# Altium PCB m2m.PcbDoc
Units mm, origin at the board's own origin, x right, y up, seen from the top; angles counter-clockwise.
Board outline 82.79 x 56.74 mm, 2 copper layers (Top Layer, Bottom Layer); 175 components, 130 nets, 579 pads, 0 vias.
Unrouted connection lines stored in the file: 376.
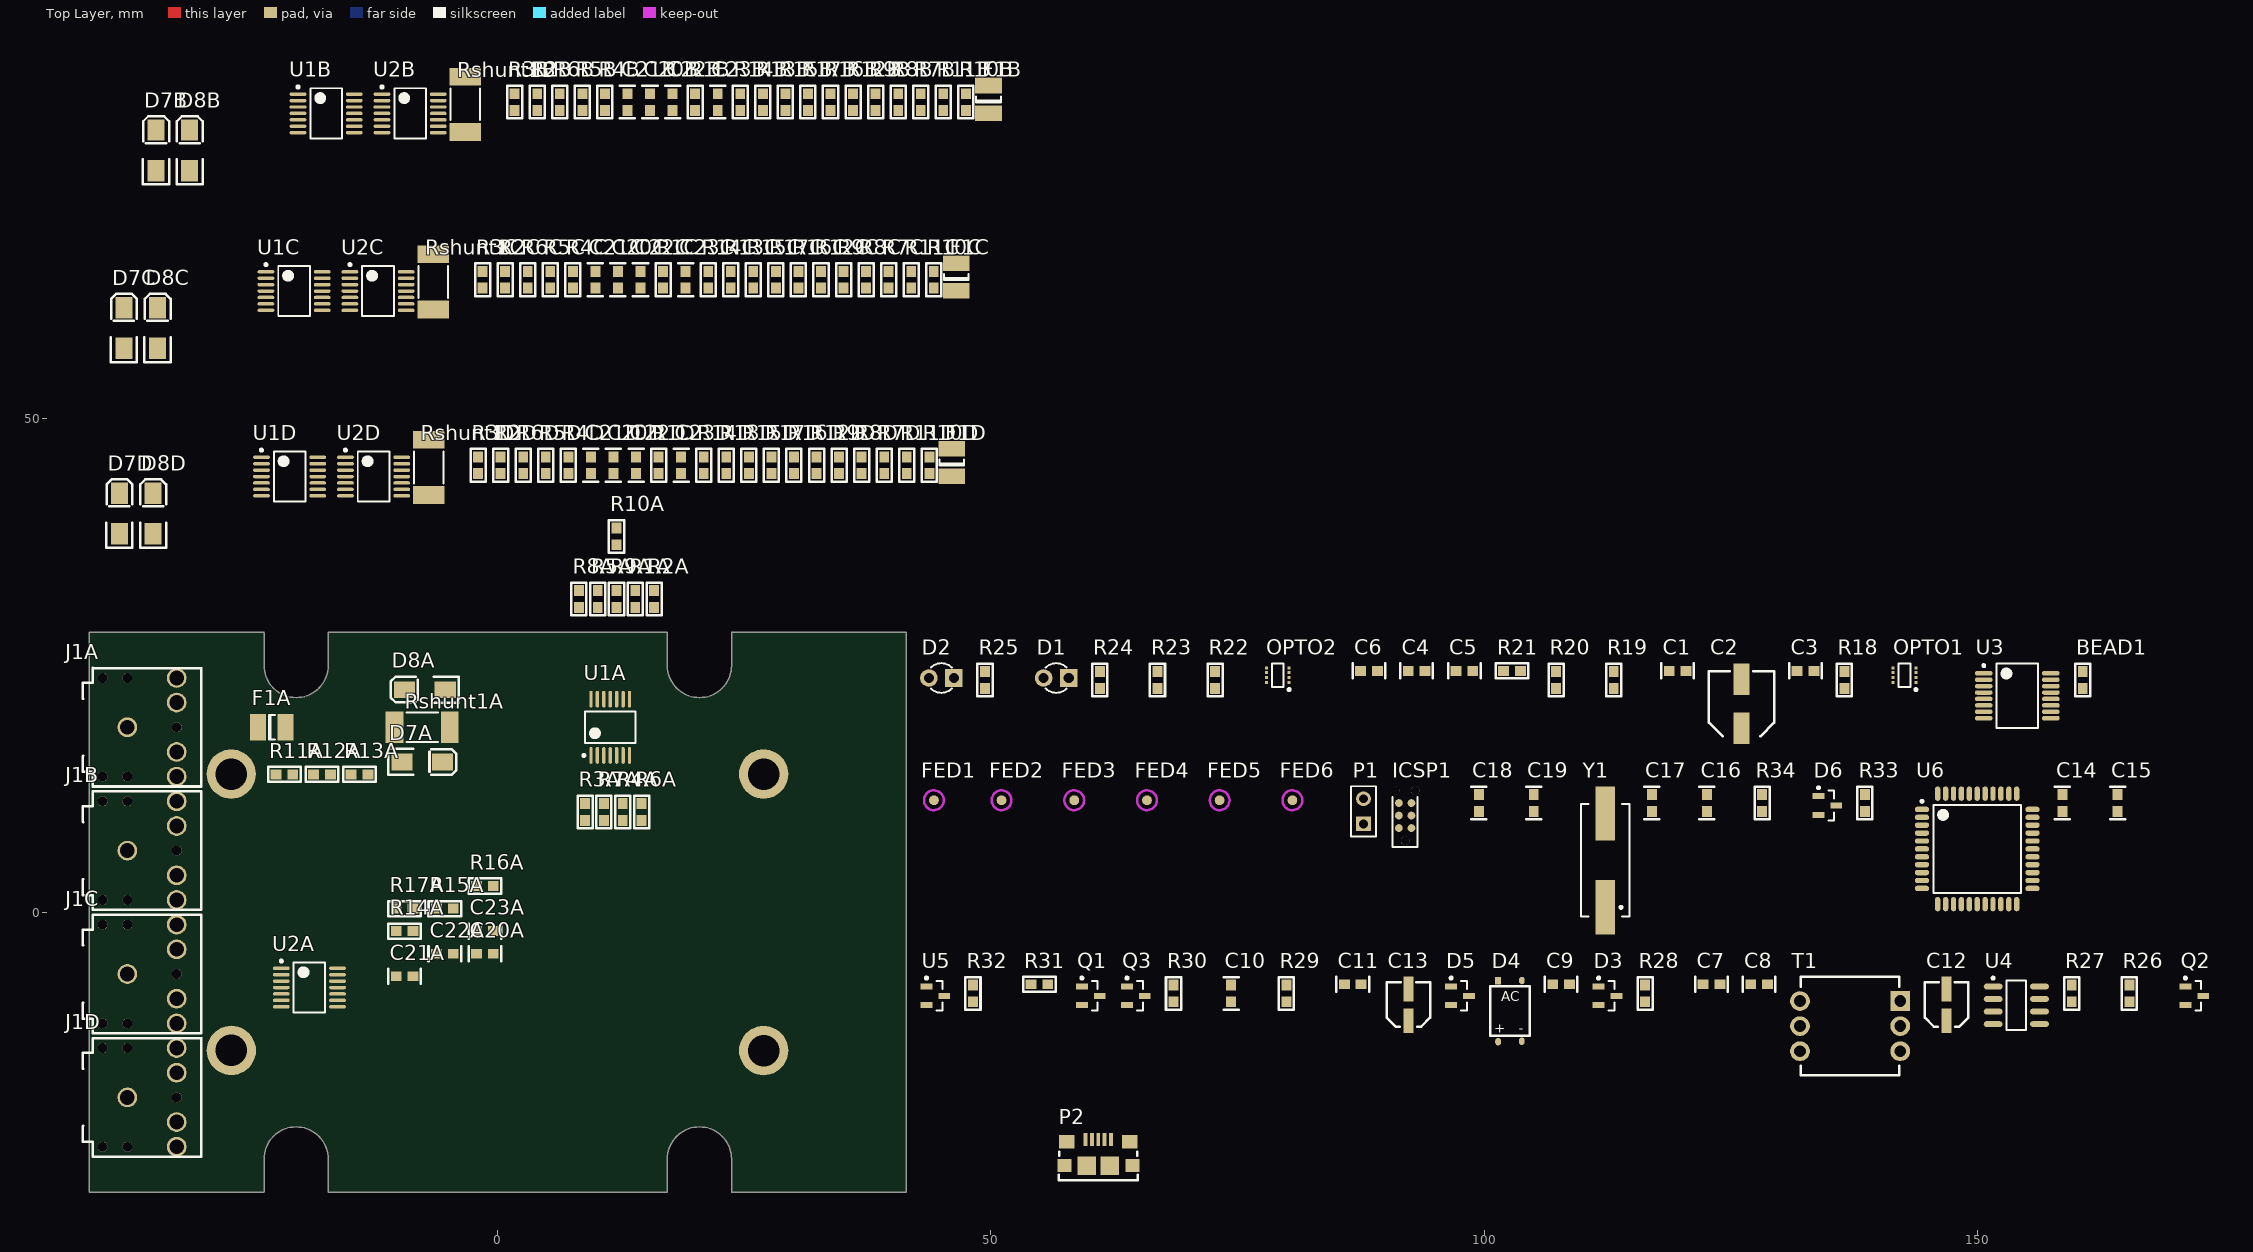
[diagram p0: Top Layer view]
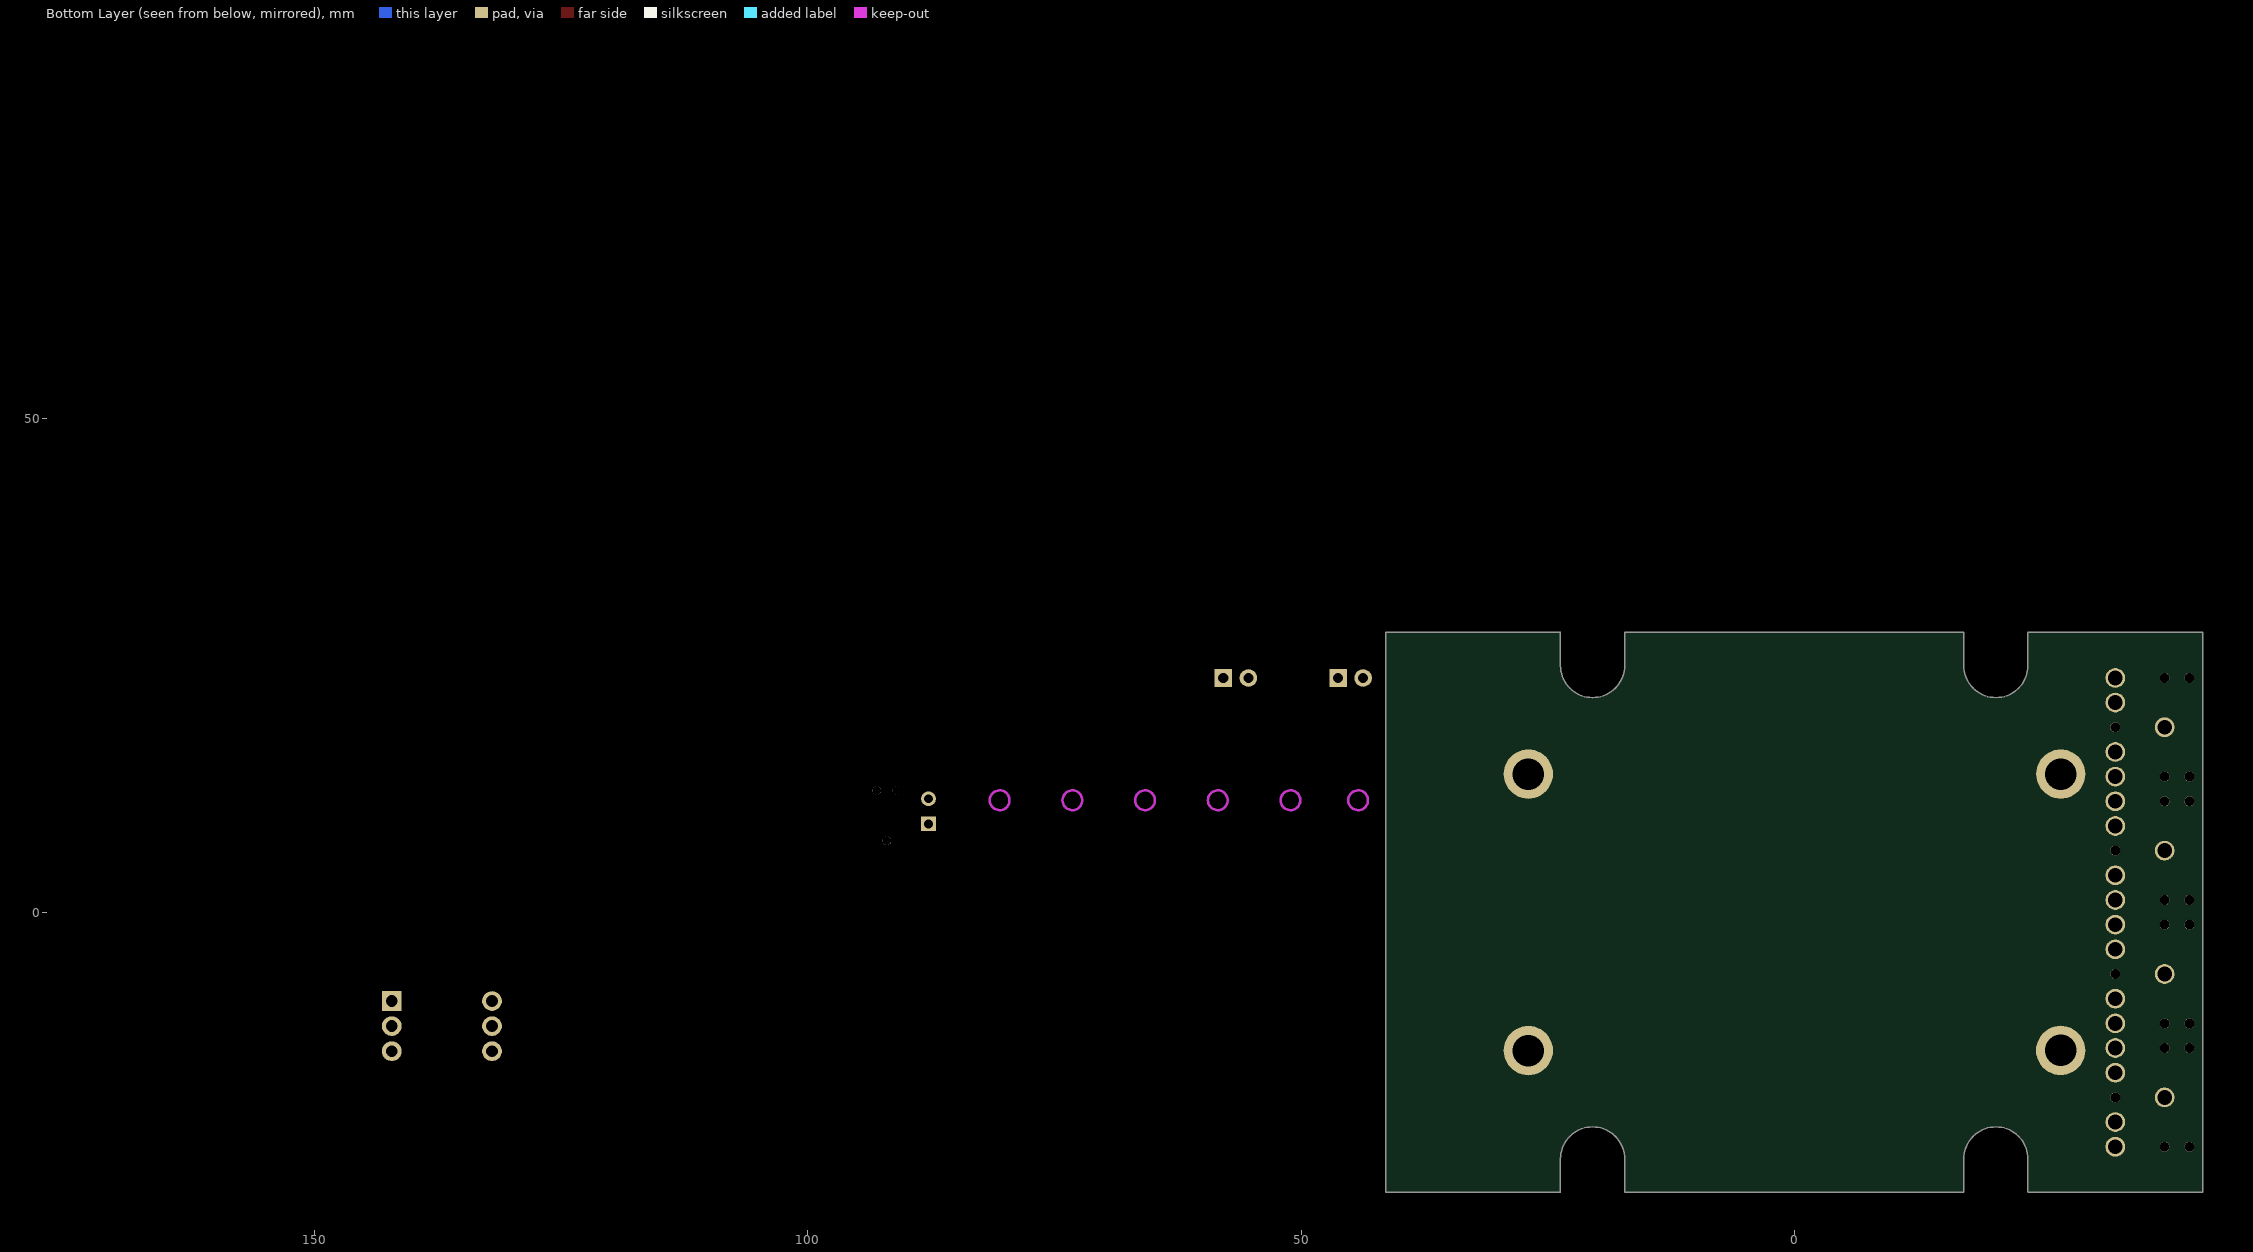
[diagram p1: Bottom Layer view, seen from below]

## Layer stack, top to bottom
Top Layer: signal copper 0.0356
Dielectric: dielectric 0.32, FR-4, Dk 4.8
Bottom Layer: signal copper 0.0356

## Board outline
-41.295,-28.361 cw(c-41.295,-28.297) -41.359,-28.297 -41.359,28.314 cw(c-41.295,28.314) -41.295,28.378 -23.711,28.378 cw(c-23.711,28.314) -23.647,28.314 -23.647,25.008 ccw(c-20.395,25.008) -17.143,25.008 cw(c-17.079,25.008) -17.143,25.008 -17.143,28.314 cw(c-17.079,28.314) -17.079,28.378 17.151,28.378 cw(c17.151,28.314) 17.215,28.314 17.215,25.008 cw(c17.151,25.008) 17.215,25.008 cw(c20.467,25.008) 17.215,25.008 ccw(c20.467,25.008) 20.467,21.756 ccw(c20.467,25.008) 20.468,21.756 ccw(c20.467,25.008) 23.719,25.008 23.719,28.314 cw(c23.783,28.314) 23.783,28.378 41.367,28.378 cw(c41.367,28.314) 41.431,28.314 41.431,-28.297 cw(c41.367,-28.297) 41.367,-28.361 23.783,-28.361 cw(c23.783,-28.297) 23.719,-28.297 23.719,-24.992 ccw(c20.467,-24.992) 17.215,-24.991 cw(c17.151,-24.992) 17.215,-24.992 17.215,-28.297 cw(c17.151,-28.297) 17.151,-28.361 -17.079,-28.361 cw(c-17.079,-28.297) -17.143,-28.297 -17.143,-24.992 cw(c-17.079,-24.992) -17.143,-24.991 cw(c-20.395,-24.992) -17.143,-24.992 -17.143,-24.991 ccw(c-20.395,-24.992) -23.647,-24.992 -23.647,-28.297 cw(c-23.711,-28.297) -23.711,-28.361

## Design rules (kind name [scope] priority, off if disabled: settings)
Clearance [All] p1: gap=0.254
PolygonConnect [All] p1: connectstyle=Relief reliefconductorwidth=0.254 reliefentries=4 polygonreliefangle="90 Angle"
RoomDefinition "U_USB-UART (FTDI FT230XS)" [InComponentClass('U_USB-UART (FTDI FT230XS)')] p1: confinementstyle=ConfineIn formatcopy=TRUE lockcomponents=FALSE outline 42.596,16.789 166.98,16.789 166.98,28.016 42.596,28.016
RoomDefinition "U_Microprocessor PIC18F46K80" [InComponentClass('U_Microprocessor PIC18F46K80')] p2: confinementstyle=ConfineIn formatcopy=TRUE lockcomponents=FALSE outline 42.57,-2.489 167.716,-2.489 167.716,15.545 42.57,15.545
RoomDefinition "U_ISOLATED PSU" [InComponentClass('U_ISOLATED PSU')] p3: confinementstyle=ConfineIn formatcopy=TRUE lockcomponents=FALSE outline 42.596,-16.789 173.711,-16.789 173.711,-3.734 42.596,-3.734
RoomDefinition U_ANALOGCHANNEL4 [InComponentClass('U_ANALOGCHANNEL4')] p4: confinementstyle=ConfineIn formatcopy=TRUE lockcomponents=FALSE outline -40,32.5 4.75,32.5 4.75,44.5 -40,44.5
RoomDefinition U_ANALOGCHANNEL3 [InComponentClass('U_ANALOGCHANNEL3')] p5: confinementstyle=ConfineIn formatcopy=TRUE lockcomponents=FALSE outline -39.547,51.295 5.203,51.295 5.203,63.295 -39.547,63.295
RoomDefinition U_ANALOGCHANNEL2 [InComponentClass('U_ANALOGCHANNEL2')] p6: confinementstyle=ConfineIn formatcopy=TRUE lockcomponents=FALSE outline -36.297,69.295 8.453,69.295 8.453,81.295 -36.297,81.295
RoomDefinition U_ANALOGCHANNEL1 [InComponentClass('U_ANALOGCHANNEL1')] p7: confinementstyle=ConfineIn formatcopy=FALSE lockcomponents=FALSE outline -40.64,12.7 19.05,12.7 19.05,24.745 -40.64,24.745
RoomDefinition Multi2Meter [InComponentClass('Multi2Meter')] p8: confinementstyle=ConfineIn formatcopy=TRUE lockcomponents=FALSE outline 56.485,-28.448 65.324,-28.448 65.324,-19.558 56.485,-19.558
RoutingVias [All] p1: holewidth=0.711 width=1.27 viastyle="Through Hole" minholewidth=0.711 minwidth=1.27 maxholewidth=0.711 maxwidth=1.27
SilkscreenOverComponentPads [All] p1: minsilkscreentomaskgap=0.254
SolderMaskExpansion [All] p1: expansion=0.102
Width [All] p1: maxlimit=0.254 minlimit=0.254 preferedwidth=0.254
27 further rules are at their usual default settings.

## Classes and differential pairs
component class Multi2Meter: P2
component class U_ANALOGCHANNEL1: C20A C21A C22A C23A D7A D8A F1A J1A R1A R2A R3A R4A R5A R6A R7A R8A R9A R10A R11A R12A R13A R14A R15A R16A R17A Rshunt1A U1A U2A
component class U_ANALOGCHANNEL2: C20B C21B C22B C23B D7B D8B F1B J1B R1B R2B R3B R4B R5B R6B R7B R8B R9B R10B R11B R12B R13B R14B R15B R16B R17B Rshunt1B U1B U2B
component class U_ANALOGCHANNEL3: C20C C21C C22C C23C D7C D8C F1C J1C R1C R2C R3C R4C R5C R6C R7C R8C R9C R10C R11C R12C R13C R14C R15C R16C R17C Rshunt1C U1C U2C
component class U_ANALOGCHANNEL4: C20D C21D C22D C23D D7D D8D F1D J1D R1D R2D R3D R4D R5D R6D R7D R8D R9D R10D R11D R12D R13D R14D R15D R16D R17D Rshunt1D U1D U2D
component class "U_ISOLATED PSU": C7 C8 C9 C10 C11 C12 C13 D3 D4 D5 Q1 Q2 Q3 R26 R27 R28 R29 R30 R31 R32 T1 U4 U5
component class "U_Microprocessor PIC18F46K80": C14 C15 C16 C17 C18 C19 D6 FED1 FED2 FED3 FED4 FED5 FED6 ICSP1 P1 R33 R34 U6 Y1
component class "U_USB-UART (FTDI FT230XS)": BEAD1 C1 C2 C3 C4 C5 C6 D1 D2 OPTO1 OPTO2 R18 R19 R20 R21 R22 R23 R24 R25 U3
net class FREQ[1..4]: FREQ1 FREQ2 FREQ3 FREQ4
net class I_OUT[1..4]: I_OUT1 I_OUT2 I_OUT3 I_OUT4
net class V_OUT[1..4]: V_OUT1 V_OUT2 V_OUT3 V_OUT4
channel class "ANALOG CHANNEL": U_ANALOGCHANNEL1 U_ANALOGCHANNEL2 U_ANALOGCHANNEL3 U_ANALOGCHANNEL4

## Components (designator, comment, footprint, x,y, rotation, side; value= is the part's Value field where it differs from the comment)
BEAD1 "MH1608-601Y" "RES (3D) - 0603" 160.63,23.546 r90 top
C1 "10nF" "CAP (3D) - 0603" 119.583,24.46 r0 top
C2 "47uF" "CAP ELECTRO SIZE-D" 126.06,21.133 r0 top
C3 "10nF" "CAP (3D) - 0603" 132.537,24.46 r0 top
C4 "47pF" "CAP (3D) - 0603" 93.142,24.46 r0 top
C5 "47pF" "CAP (3D) - 0603" 97.968,24.46 r0 top
C6 "100nF" "CAP (3D) - 0603" 88.316,24.46 r0 top
C7 "100nF" "CAP (3D) - 0603" 123.012,-7.29 r0 top
C8 "100nF" "CAP (3D) - 0603" 127.838,-7.29 r0 top
C9 "100nF" "CAP (3D) - 0603" 107.772,-7.29 r0 top
C10 "100nF" "CAP (3D) - 0603" 74.346,-8.204 r90 top
C11 "100nF" "CAP (3D) - 0603" 86.665,-7.29 r0 top
C12 "10uF" "CAP ELECTRO SIZE-B" 146.837,-9.373 r0 top
C13 "10uF" "CAP ELECTRO SIZE-B" 92.304,-9.373 r0 top
C14 "100nF" "CAP (3D) - 0603" 158.572,11.074 r90 top
C15 "100nF" "CAP (3D) - 0603" 164.16,11.074 r90 top
C16 "100nF" "CAP (3D) - 0603" 122.555,11.074 r90 top
C17 "100nF" "CAP (3D) - 0603" 116.967,11.074 r90 top
C18 "15pF" "CAP (3D) - 0603" 99.441,11.074 r90 top
C19 "15pF" "CAP (3D) - 0603" 105.004,11.074 r90 top
C20A "100nF" "CAP (3D) - 0603" -1.27,-4.191 r180 top (schematic designator C20)
C20B "100nF" "CAP (3D) - 0603" 15.46,82.097 r90 top (schematic designator C20)
C20C "100nF" "CAP (3D) - 0603" 12.21,64.097 r90 top (schematic designator C20)
C20D "100nF" "CAP (3D) - 0603" 11.757,45.302 r90 top (schematic designator C20)
C21A "100nF" "CAP (3D) - 0603" -9.398,-6.477 r180 top (schematic designator C21)
C21B "100nF" "CAP (3D) - 0603" 13.174,82.097 r90 top (schematic designator C21)
C21C "100nF" "CAP (3D) - 0603" 9.924,64.097 r90 top (schematic designator C21)
C21D "100nF" "CAP (3D) - 0603" 9.471,45.302 r90 top (schematic designator C21)
C22A "100nF" "CAP (3D) - 0603" -5.334,-4.191 r180 top (schematic designator C22)
C22B "100nF" "CAP (3D) - 0603" 17.746,82.097 r90 top (schematic designator C22)
C22C "100nF" "CAP (3D) - 0603" 14.496,64.097 r90 top (schematic designator C22)
C22D "100nF" "CAP (3D) - 0603" 14.043,45.302 r90 top (schematic designator C22)
C23A "100nF" "CAP (3D) - 0603" -1.27,-1.905 r180 top (schematic designator C23)
C23B "100nF" "CAP (3D) - 0603" 22.318,82.097 r90 top (schematic designator C23)
C23C "100nF" "CAP (3D) - 0603" 19.068,64.097 r90 top (schematic designator C23)
C23D "100nF" "CAP (3D) - 0603" 18.615,45.302 r90 top (schematic designator C23)
D1 "GREEN 3mm" "LED(3D) 3MM VERTICAL (GREEN)" 56.617,23.749 r0 top
D2 "RED 3mm" "LED(3D) 3MM VERTICAL (GREEN)" 44.983,23.749 r0 top
D3 "5V1" SOT23-3L 112.471,-8.458 r0 top
D4 "MB110S-TP" TO-269AA 102.591,-10.008 r0 top
D5 "5V1" SOT23-3L 97.536,-8.458 r0 top
D6 "BAV99" SOT23-3L 134.747,10.82 r0 top
D7A "S1M" DO-214AC -7.62,15.24 r0 top (schematic designator D7)
D7B "S1M" DO-214AC -34.595,77.206 r90 top (schematic designator D7)
D7C "S1M" DO-214AC -37.845,59.206 r90 top (schematic designator D7)
D7D "S1M" DO-214AC -38.298,40.411 r90 top (schematic designator D7)
D8A "S1M" DO-214AC -7.36,22.56 r180 top (schematic designator D8)
D8B "S1M" DO-214AC -31.192,77.206 r90 top (schematic designator D8)
D8C "S1M" DO-214AC -34.442,59.206 r90 top (schematic designator D8)
D8D "S1M" DO-214AC -34.895,40.411 r90 top (schematic designator D8)
F1A "1.1A" "LITTELFUSE 1210" -22.86,18.75 r0 top (schematic designator F1)
F1B "1.1A" "LITTELFUSE 1210" 49.75,82.373 r90 top (schematic designator F1)
F1C "1.1A" "LITTELFUSE 1210" 46.5,64.373 r90 top (schematic designator F1)
F1D "1.1A" "LITTELFUSE 1210" 46.047,45.578 r90 top (schematic designator F1)
FED1 "Feducial" Feducial 44.221,11.354 r90 top
FED2 "Feducial" Feducial 51.079,11.354 r90 top
FED3 "Feducial" Feducial 58.445,11.354 r90 top
FED4 "Feducial" Feducial 65.811,11.354 r90 top
FED5 "Feducial" Feducial 73.177,11.354 r90 top
FED6 "Feducial" Feducial 80.543,11.354 r90 top
ICSP1 "TAG CONNECT" "ICSP - TAG CONNECT TYPE2" 91.973,7.264 r90 top
J1A "PENDANT" "3.5MM pcb mouNt" -37.5,18.75 r180 top locked (schematic designator J1)
J1B "PENDANT" "3.5MM pcb mouNt" -37.5,6.25 r180 top locked (schematic designator J1)
J1C "PENDANT" "3.5MM pcb mouNt" -37.5,-6.25 r180 top locked (schematic designator J1)
J1D "PENDANT" "3.5MM pcb mouNt" -37.5,-18.75 r180 top locked (schematic designator J1)
OPTO1 "LTV-816S" S-DIP-B8 142.57,24.028 r90 top
OPTO2 "LTV-816S" S-DIP-B8 79.07,24.028 r90 top
P1 "TEST" HDR1X2 87.757,8.966 r90 top
P2 "Header 4" "MICRO USB" 60.879,-23.012 r0 top
Q1 "MMUN2211LT1" SOT23-3L 60.122,-8.458 r0 top
Q2 "BC817" SOT23-3L 171.933,-8.458 r0 top
Q3 "BC807" SOT23-3L 64.694,-8.458 r0 top
R1A "10k" "RES (3D) - 0603" 13.97,31.75 r270 top (schematic designator R1)
R1B "10k" "RES (3D) - 0603" 20.032,82.097 r90 top (schematic designator R1)
R1C "10k" "RES (3D) - 0603" 16.782,64.097 r90 top (schematic designator R1)
R1D "10k" "RES (3D) - 0603" 16.329,45.302 r90 top (schematic designator R1)
R2A "24k" "RES (3D) - 0603" 15.875,31.75 r90 top (schematic designator R2)
R2B "24k" "RES (3D) - 0603" 4.03,82.097 r90 top (schematic designator R2)
R2C "24k" "RES (3D) - 0603" 0.78,64.097 r90 top (schematic designator R2)
R2D "24k" "RES (3D) - 0603" 0.327,45.302 r90 top (schematic designator R2)
R3A "16k" "RES (3D) - 0603" 8.89,10.16 r90 top (schematic designator R3)
R3B "16k" "RES (3D) - 0603" 1.744,82.097 r90 top (schematic designator R3)
R3C "16k" "RES (3D) - 0603" -1.506,64.097 r90 top (schematic designator R3)
R3D "16k" "RES (3D) - 0603" -1.959,45.302 r90 top (schematic designator R3)
R4A "100k" "RES (3D) - 0603" 12.7,10.16 r270 top (schematic designator R4)
R4B "100k" "RES (3D) - 0603" 10.888,82.097 r90 top (schematic designator R4)
R4C "100k" "RES (3D) - 0603" 7.638,64.097 r90 top (schematic designator R4)
R4D "100k" "RES (3D) - 0603" 7.185,45.302 r90 top (schematic designator R4)
R5A "10k" "RES (3D) - 0603" 10.16,31.75 r270 top (schematic designator R5)
R5B "10k" "RES (3D) - 0603" 8.602,82.097 r90 top (schematic designator R5)
R5C "10k" "RES (3D) - 0603" 5.352,64.097 r90 top (schematic designator R5)
R5D "10k" "RES (3D) - 0603" 4.899,45.302 r90 top (schematic designator R5)
R6A "100k" "RES (3D) - 0603" 14.605,10.16 r270 top (schematic designator R6)
R6B "100k" "RES (3D) - 0603" 6.316,82.097 r90 top (schematic designator R6)
R6C "100k" "RES (3D) - 0603" 3.066,64.097 r90 top (schematic designator R6)
R6D "100k" "RES (3D) - 0603" 2.613,45.302 r90 top (schematic designator R6)
R7A "11k" "RES (3D) - 0603" 10.795,10.16 r270 top (schematic designator R7)
R7B "11k" "RES (3D) - 0603" 42.892,82.097 r90 top (schematic designator R7)
R7C "11k" "RES (3D) - 0603" 39.642,64.097 r90 top (schematic designator R7)
R7D "11k" "RES (3D) - 0603" 39.189,45.302 r90 top (schematic designator R7)
R8A "16k" "RES (3D) - 0603" 8.255,31.75 r90 top (schematic designator R8)
R8B "16k" "RES (3D) - 0603" 40.606,82.097 r90 top (schematic designator R8)
R8C "16k" "RES (3D) - 0603" 37.356,64.097 r90 top (schematic designator R8)
R8D "16k" "RES (3D) - 0603" 36.903,45.302 r90 top (schematic designator R8)
R9A "10k" "RES (3D) - 0603" 12.065,31.75 r270 top (schematic designator R9)
R9B "10k" "RES (3D) - 0603" 38.32,82.097 r90 top (schematic designator R9)
R9C "10k" "RES (3D) - 0603" 35.07,64.097 r90 top (schematic designator R9)
R9D "10k" "RES (3D) - 0603" 34.617,45.302 r90 top (schematic designator R9)
R10A "24k" "RES (3D) - 0603" 12.065,38.1 r90 top (schematic designator R10)
R10B "24k" "RES (3D) - 0603" 47.464,82.097 r90 top (schematic designator R10)
R10C "24k" "RES (3D) - 0603" 44.214,64.097 r90 top (schematic designator R10)
R10D "24k" "RES (3D) - 0603" 43.761,45.302 r90 top (schematic designator R10)
R11A "9M1" "RES (3D) - 0603" -21.59,13.97 r180 top (schematic designator R11)
R11B "9M1" "RES (3D) - 0603" 45.178,82.097 r90 top (schematic designator R11)
R11C "9M1" "RES (3D) - 0603" 41.928,64.097 r90 top (schematic designator R11)
R11D "9M1" "RES (3D) - 0603" 41.475,45.302 r90 top (schematic designator R11)
R12A "470k" "RES (3D) - 0603" -17.78,13.97 r180 top (schematic designator R12)
R12B "470k" "RES (3D) - 0603" 36.034,82.097 r90 top (schematic designator R12)
R12C "470k" "RES (3D) - 0603" 32.784,64.097 r90 top (schematic designator R12)
R12D "470k" "RES (3D) - 0603" 32.331,45.302 r90 top (schematic designator R12)
R13A "430k" "RES (3D) - 0603" -13.97,13.97 r180 top (schematic designator R13)
R13B "430k" "RES (3D) - 0603" 26.89,82.097 r90 top (schematic designator R13)
R13C "430k" "RES (3D) - 0603" 23.64,64.097 r90 top (schematic designator R13)
R13D "430k" "RES (3D) - 0603" 23.187,45.302 r90 top (schematic designator R13)
R14A "100k" "RES (3D) - 0603" -9.398,-1.905 r180 top (schematic designator R14)
R14B "100k" "RES (3D) - 0603" 24.604,82.097 r90 top (schematic designator R14)
R14C "100k" "RES (3D) - 0603" 21.354,64.097 r90 top (schematic designator R14)
R14D "100k" "RES (3D) - 0603" 20.901,45.302 r90 top (schematic designator R14)
R15A "100k" "RES (3D) - 0603" -5.334,0.381 r180 top (schematic designator R15)
R15B "100k" "RES (3D) - 0603" 29.176,82.097 r90 top (schematic designator R15)
R15C "100k" "RES (3D) - 0603" 25.926,64.097 r90 top (schematic designator R15)
R15D "100k" "RES (3D) - 0603" 25.473,45.302 r90 top (schematic designator R15)
R16A "24k" "RES (3D) - 0603" -1.27,2.667 r180 top (schematic designator R16)
R16B "24k" "RES (3D) - 0603" 33.748,82.097 r90 top (schematic designator R16)
R16C "24k" "RES (3D) - 0603" 30.498,64.097 r90 top (schematic designator R16)
R16D "24k" "RES (3D) - 0603" 30.045,45.302 r90 top (schematic designator R16)
R17A "11k" "RES (3D) - 0603" -9.398,0.381 r180 top (schematic designator R17)
R17B "11k" "RES (3D) - 0603" 31.462,82.097 r90 top (schematic designator R17)
R17C "11k" "RES (3D) - 0603" 28.212,64.097 r90 top (schematic designator R17)
R17D "11k" "RES (3D) - 0603" 27.759,45.302 r90 top (schematic designator R17)
R18 "470R" "RES (3D) - 0603" 136.474,23.546 r90 top
R19 "27R" "RES (3D) - 0603" 113.106,23.546 r90 top
R20 "1k" "RES (3D) - 0603" 107.264,23.546 r90 top
R21 "27R" "RES (3D) - 0603" 102.794,24.46 r0 top
R22 "470R" "RES (3D) - 0603" 72.72,23.546 r90 top
R23 "1k" "RES (3D) - 0603" 66.878,23.546 r90 top
R24 "470R" "RES (3D) - 0603" 61.036,23.546 r90 top
R25 "470R" "RES (3D) - 0603" 49.403,23.546 r90 top
R26 "1k" "RES (3D) - 0603" 165.354,-8.204 r90 top
R27 "100k" "RES (3D) - 0603" 159.512,-8.204 r90 top
R28 "100R" "RES (3D) - 0603" 116.281,-8.204 r90 top
R29 "100k" "RES (3D) - 0603" 79.934,-8.204 r90 top
R30 "1k" "RES (3D) - 0603" 68.504,-8.204 r90 top
R31 "10k" "RES (3D) - 0603" 54.915,-7.29 r0 top
R32 "10k" "RES (3D) - 0603" 48.184,-8.204 r90 top
R33 "1k" "RES (3D) - 0603" 138.557,11.074 r90 top
R34 "1k" "RES (3D) - 0603" 128.143,11.074 r90 top
Rshunt1A "0.1R" 1T-2512 -7.62,18.75 r180 top (schematic designator Rshunt1)
Rshunt1B "0.1R" 1T-2512 -3.251,81.87 r90 top (schematic designator Rshunt1)
Rshunt1C "0.1R" 1T-2512 -6.501,63.87 r90 top (schematic designator Rshunt1)
Rshunt1D "0.1R" 1T-2512 -6.954,45.075 r90 top (schematic designator Rshunt1)
T1 "MURATA 782485/55C" 78248 137.058,-11.532 r0 top
U1A "LM2902PW" PW014_N 11.43,18.75 r90 top (schematic designator U1)
U1B "LM2902PW" PW014_N -17.358,80.95 r0 top (schematic designator U1)
U1C "LM2902PW" PW014_N -20.608,62.95 r0 top (schematic designator U1)
U1D "LM2902PW" PW014_N -21.061,44.155 r0 top (schematic designator U1)
U2A "LM2902PW" PW014_N -19.05,-7.62 r0 top (schematic designator U2)
U2B "LM2902PW" PW014_N -8.85,80.95 r0 top (schematic designator U2)
U2C "LM2902PW" PW014_N -12.1,62.95 r0 top (schematic designator U2)
U2D "LM2902PW" PW014_N -12.553,44.155 r0 top (schematic designator U2)
U3 "FT230XS" SSOP16_L 154,21.946 r0 top
U4 "MAX253" SO-8C_L 153.899,-9.423 r0 top
U5 "LM4040AIM3-2.0" SOT23-3L 44.374,-8.458 r0 top
U6 "PIC18F46K80-I/PT" TQFP44_L 149.936,6.426 r0 top
Y1 "XTAL" HC49/4H_SMX 112.243,5.258 r90 top

## Footprints (in the part's own frame and the unit in brackets; to place one, negate y for a bottom-side part, rotate by r counter-clockwise, add the part's x,y. Pads: shape width x height; smd on the part's side, far side on the other; paste and mask are expansions set on the pad)
1T-2512 [mm] "Chip Resistor; Body 6.4 x 3.2 mm (LxW typ)"
  rect 1.8x3.2 smd: 1(-2.8,0) 2(2.8,0)
  silkscreen extent -1.6,-1.5 1.6,1.5
"3.5MM pcb mouNt" [mm]
  round 1 hole 1: 0(-5,0) 0(0,5) 0(0,-5) 0(2.5,5) 0(2.5,-5)
  round 2 hole 1.5: 1(0,0) 2(-5,5) 3(-5,2.5) 4(-5,-2.5) 5(-5,-5)
  silkscreen extent -7.5,-6.01 4.5,6.01, body extent -7.5,-6 6.55,6, height 5.52
78248 [mm]
  rect 2x2 hole 1.2: 1(5.08,2.54)
  round 2 hole 1.2: 2(5.08,0) 3(5.08,-2.54) 4(-5.08,-2.54) 5(-5.08,0) 6(-5.08,2.54)
  silkscreen extent -5,-5 5,5, body extent -5,-5 5,5, height 6.35
"CAP (3D) - 0603" [mm]
  rect 1.1x1 smd: 1(0.85,0) 2(-0.85,0)
  silkscreen extent -1.65,-0.76 1.65,0.76, body extent -0.8,-0.4 0.8,0.4, height 0.92
"CAP ELECTRO SIZE-B" [mm]
  rect 1x2.5 smd: 1(0,-1.6) 2(0,1.6)
  silkscreen extent -2.2,-2.2 2.2,2.3, body extent -2.15,-2.3 2.15,2.3, height 5.41
"CAP ELECTRO SIZE-D" [mm]
  rect 1.6x3.2 smd: 1(0,-2.5) 2(0,2.5)
  silkscreen extent -3.3,-3.3 3.3,3.3, body extent -3.3,-3.5 3.3,3.5, height 5.41
DO-214AC [mil]
  rect 85x67 smd: 1(-81,0) 2(81,0)
  silkscreen extent -136,-52 136,52, body extent -79,-39 79,39, height 61
Feducial [mm]
  round 1 smd mask+1: 0(0,0)
  Keep-Out Layer circle w0.254: c0,0 r1
HC49/4H_SMX [mm] "Quartz Crystal, SM; Body 13.4 (inc. leads) x 4.9 mm (LxW max)"
  rect 5.5x2 smd: 1(-4.75,0) 2(4.75,0)
  silkscreen extent -5.7,-2.45 5.7,2.45
HDR1X2 [mm] "Connector; Header; 2 Position"
  rect 1.5x1.5 hole 0.9: 1(0,0)
  round 1.5 hole 0.9: 2(2.54,0)
  silkscreen extent -1.27,-1.27 3.81,1.27
"ICSP - TAG CONNECT TYPE2" [mil] "ICSP - TAG CONNECT - TYPE 2"
  round 31 smd paste-40: 1(50,-25) 2(50,25) 3(100,-25) 4(100,25) 5(150,-25) 6(150,25)
  round 34 hole 35 unplated: A(0,0) B(200,40) C(200,-40)
  silkscreen extent -25,-50 175,50
"LED(3D) 3MM VERTICAL (GREEN)" [mil]
  rect 70x70 hole 40: 1(50.06,-0.28)
  round 70 hole 40: 2(-49.94,-0.28)
  silkscreen extent -42,-59 42,59, body extent -59,-59 59,59, height 236
"LITTELFUSE 1210" [mm] "Chip Capacitor; Body 3.2 x 2.5 mm (LxW typ)"
  rect 1.6x2.7 smd: 1(-1.4,0) 2(1.4,0)
  silkscreen extent -0.3,-1.25 0.3,1.25, body extent -1.61,-1.29 1.61,1.29, height 0.67
"MICRO USB" [mm] "TE CONNECTIVITY 1981568-1"
  rect 1.45x1.3 smd: 0(-3.425,-2.625) 0(3.475,-2.625)
  rect 1.6x1.4 smd: 0(-3.2,-0.225) 0(3.2,-0.225)
  rect 1.9x1.9 smd: 0(-1.175,-2.675) 0(1.175,-2.675)
  rect 0.4x1.35 smd: 1(1.3,0) 2(0.65,0) 3(0,0) 4(-0.65,0) 5(-1.3,0)
  silkscreen extent -4.03,-4.13 4.03,-1.27, body extent -3.97,-5.3 4.03,0.3, height 2.83
PW014_N [mm] "TSOP, 14-Leads, Body 5x4.4mm, Pitch 0.65mm, IPC Medium Density"
  oval 1.7x0.35 smd: 1(-2.85,1.95) 2(-2.85,1.3) 3(-2.85,0.65) 4(-2.85,0) 5(-2.85,-0.65) 6(-2.85,-1.3) 7(-2.85,-1.95) 8(2.85,-1.95) 9(2.85,-1.3) 10(2.85,-0.65) 11(2.85,0) 12(2.85,0.65) 13(2.85,1.3) 14(2.85,1.95)
  silkscreen extent -2.97,-2.55 1.6,2.8, body extent -2.25,-2.55 2.25,2.55, height 1.2
"RES (3D) - 0603" [mm]
  rect 1.1x1 smd: 1(0.85,0) 2(-0.85,0)
  silkscreen extent -1.65,-0.76 1.65,0.76, body extent -0.8,-0.4 0.8,0.4, height 0.92
S-DIP-B8 [mm] "Shrink DIP; 8 Stub Leads; Row Spacing 2.28 mm; Pitch 0.5 mm"
  rect 0.3x0.3 smd: 1(-0.75,-1.15) 2(-0.25,-1.15) 3(0.25,-1.15) 4(0.75,-1.15) 5(0.75,1.15) 6(0.25,1.15) 7(-0.25,1.15) 8(-0.75,1.15)
  silkscreen extent -1.58,-1.28 1.2,0.6
SO-8C_L [mm] "SOIC, 8-Leads, Body 4.9x3.9mm, Pitch 1.27mm, IPC High Density"
  oval 1.9x0.6 smd: 1(-2.35,1.905) 2(-2.35,0.635) 3(-2.35,-0.635) 4(-2.35,-1.905) 5(2.35,-1.905) 6(2.35,-0.635) 7(2.35,0.635) 8(2.35,1.905)
  silkscreen extent -2.47,-2.5 1,2.88, body extent -2,-2.5 2,2.5, height 1.75
SOT23-3L [mm] "SOT23, 3-Leads, Body 2.9x1.3mm, Pitch 0.95mm, Lead Span 2.5mm, IPC High Density"
  rect 1.2x0.6 smd: 1(-0.9,0.95) 2(-0.9,-0.95) 3(0.9,0)
  silkscreen extent -1.02,-1.5 0.7,1.92, body extent -1.25,-1.5 1.25,1.5, height 1.12
SSOP16_L [mm] "SOP, 16-Leads, Body 6.2x5.3mm, Pitch 0.65mm, IPC High Density"
  oval 1.8x0.45 smd: 1(-3.4,2.275) 2(-3.4,1.625) 3(-3.4,0.975) 4(-3.4,0.325) 5(-3.4,-0.325) 6(-3.4,-0.975) 7(-3.4,-1.625) 8(-3.4,-2.275) 9(3.4,-2.275) 10(3.4,-1.625) 11(3.4,-0.975) 12(3.4,-0.325) 13(3.4,0.325) 14(3.4,0.975) 15(3.4,1.625) 16(3.4,2.275)
  silkscreen extent -3.52,-3.25 2.1,3.25, body extent -2.7,-3.25 2.7,3.25, height 2
TO-269AA [mm]
  rect 0.58x0.76 smd: 1(-1.2,3.1)
  oval 0.58x0.76 smd: 2(-1.2,-3.1) 3(1.21,-3.05) 4(1.21,3.1)
  silkscreen extent -2,-2.5 2,2.5, body extent -2,-2.5 2,2.5, height 3
TQFP44_L [mm] "44-Pin Plastic Thin Quad Flat Pack (TFQP44), IPC High Density"
  oval 1.45x0.55 smd: 1(-5.6,4) 2(-5.6,3.2) 3(-5.6,2.4) 4(-5.6,1.6) 5(-5.6,0.8) 6(-5.6,0) 7(-5.6,-0.8) 8(-5.6,-1.6) 9(-5.6,-2.4) 10(-5.6,-3.2) 11(-5.6,-4) 23(5.6,-4) 24(5.6,-3.2) 25(5.6,-2.4) 26(5.6,-1.6) 27(5.6,-0.8) 28(5.6,0) 29(5.6,0.8) 30(5.6,1.6) 31(5.6,2.4) 32(5.6,3.2) 33(5.6,4)
  oval 0.55x1.45 smd: 12(-4,-5.6) 13(-3.2,-5.6) 14(-2.4,-5.6) 15(-1.6,-5.6) 16(-0.8,-5.6) 17(0,-5.6) 18(0.8,-5.6) 19(1.6,-5.6) 20(2.4,-5.6) 21(3.2,-5.6) 22(4,-5.6) 34(4,5.6) 35(3.2,5.6) 36(2.4,5.6) 37(1.6,5.6) 38(0.8,5.6) 39(0,5.6) 40(-0.8,5.6) 41(-1.6,5.6) 42(-2.4,5.6) 43(-3.2,5.6) 44(-4,5.6)
  silkscreen extent -5.72,-4.45 4.45,4.95, body extent -5,-5 5,5, height 1.2

## Part data
BEAD1: library part "FERRITE BEAD 0603", "FERRITE BEAD 0603 BOURNS MH1608-601Y"
C1 C2 C3 C4 C5 C6 C7 C8 C9 C10 C11 C20A C20B C20C C20D C21A C21B C21C C21D C22A C22B C22C C22D C23A C23B C23C C23D: library part Cap, "Capacitor"
C12 C13: library part "Cap Pol1", "Polarized Capacitor (Radial)"
C14 C15 C16 C17 C18 C19: library part CAP, "CAPACITOR SMD 0402"
D1 D2: library part "LED 3mm RED", "3mm RED LED"
D3 D5: library part "D Zener", "Zener Diode"
D4: library part Bridge1, "Full Wave Schottky Diode Bridge"
D6: "DUAL DIODE, BAV99"
D7A D7B D7C D7D D8A D8B D8C D8D: library part DIODE, "DIODE, POWER"
F1A F1B F1C F1D: library part "Fuse 2", "Fuse"
ICSP1: library part "ICSP - TAG CONNECT"
J1A J1B J1C J1D: library part "Phonejack Stereo SW", "3-Conductor Jack with 2 break contacts (normals) and 2 auxiliary make contacts"
OPTO1 OPTO2: "Transistor Output Optocoupler"
P1: library part "Header 2", "Header, 2-Pin"
P2: "Header, 4-Pin"
Q1: library part "NPN DIGITAL TRANSISTOR"
Q2: "NPN Bipolar Transistor"
Q3: library part 2N3906, "PNP General Purpose Amplifier"
R1A R1B R1C R1D R2A R2B R2C R2D R3A R3B R3C R3D R4A R4B R4C R4D R5A R5B R5C R5D R6A R6B R6C R6D R7A R7B R7C R7D R8A R8B R8C R8D R9A R9B R9C R9D R10A R10B R10C R10D R11A R11B R11C R11D R12A R12B R12C R12D R13A R13B R13C R13D R14A R14B R14C R14D R15A R15B R15C R15D R16A R16B R16C R16D R17A R17B R17C R17D R32 R33: library part "RES SMD 0603 10k", "RESISTOR SMD 0603 10k"
R18 R20 R22 R23 R24 R25: library part "RES SMD 0603 1k", "RESISTOR SMD 0603 1k"
R19 R21 R26 R27 R28 R29 R30 R31 R34: library part "RES SMD 0603 100R", "RESISTOR SMD 0603"
Rshunt1A Rshunt1B Rshunt1C Rshunt1D: library part "RES SMD 0603 10k", "RESISTOR SMD 0603"
T1: library part "Trans CT", "Center-Tapped Transformer (Coupled Inductor Model)"
U1A U1B U1C U1D U2A U2B U2C U2D: "Quadruple Operational Amplifier"
U3: library part "FTDI FT230XS", "FTDI FT230XS USB - UART"
U5: "Precision Micropower Shunt Voltage Reference"
U6: library part PIC18F4XK80-I/PT, "PIC18F4XK80-I/PT"
Y1: "Crystal Oscillator"

## Free pads (board coordinates)
  round 5 hole 3.2: 0(-26.975,14.008) 0(-26.964,-13.992) 0(26.975,-14.008) 0(26.975,14.008)

## Nets (pads, with @x,y where several pads share a name; then routed paths per layer and width w, separated by ;. In a path a pad name is that pad's centre, name@x,y a point inside that pad or via, vN(x,y) a via of type N, cw(c..) or ccw(c..) an arc to the next point about the centre after c; other vN are vias at no path point)
1V1: R17A.1 U6.8
1V2: R17B.1 U6.9
1V3: R17C.1 U6.10
1V4: R17D.1 U6.11
5V: C8.2 C21A.2 C21B.2 C21C.2 C21D.2 C23A.2 C23B.2 C23C.2 C23D.2 Q2.2 R32.2 U1A.4 U1B.4 U1C.4 U1D.4 U2A.4 U2B.4 U2C.4 U2D.4
10V1: R16A.1 U6.32
10V2: R16B.1 U6.35
10V3: R16C.1 U6.36
10V4: R16D.1 U6.43
100MA1: R7A.1 U6.2
100MA2: R7B.1 U6.3
100MA3: R7C.1 U6.4
100MA4: R7D.1 U6.5
-5V: C11.1 C20A.2 C20B.2 C20C.2 C20D.2 C22A.2 C22B.2 C22C.2 C22D.2 Q3.1 U1A.11 U1B.11 U1C.11 U1D.11 U2A.11 U2B.11 U2C.11 U2D.11
AMPS_INA: F1A.1 J1A.5
AMPS_INB: F1B.1 J1B.5
AMPS_INC: F1C.1 J1C.5
AMPS_IND: F1D.1 J1D.5
CBUS_0: R28.1 U3.12
COM: U5.2
FREQ1: U2A.7 U6.38
FREQ2: U2B.7 U6.39
FREQ3: U2C.7 U6.40
FREQ4: U2D.7 U6.41
FTDI_RX: R18.1 U3.2
FTDI_TX: OPTO2.3 R23.2 U3.15
GND: C7.1 C8.1 C10.2 C11.2 C12.2 C13.1 C14.2 C15.2 C16.2 C17.2 C18.2 C19.2 C20A.1 C20B.1 C20C.1 C20D.1 C21A.1 C21B.1 C21C.1 C21D.1 C22A.1 C22B.1 C22C.1 C22D.1 C23A.1 C23B.1 C23C.1 C23D.1 D3.1 D5.3 D7A.2 D7B.2 D7C.2 D7D.2 D8A.1 D8B.1 D8C.1 D8D.1 ICSP1.3 J1A.1 J1B.1 J1C.1 J1D.1 P1.1 P1.2 R6A.1 R6B.1 R6C.1 R6D.1 R10A.1 R10B.1 R10C.1 R10D.1 R13A.2 R13B.2 R13C.2 R13D.2 R15A.1 R15B.1 R15C.1 R15D.1 R20.1 R27.2 R29.1 Rshunt1A.1 Rshunt1B.1 Rshunt1C.1 Rshunt1D.1 T1.5 U1A.12 U1B.12 U1C.12 U1D.12 U2A.6 U2B.6 U2C.6 U2D.6 U6.6 U6.29
GND_USB: C1.1 C2.1 C3.1 C4.1 C5.1 C6.1 C9.1 OPTO1.2 P2.4 Q1.2 R23.1 R24.2 R25.2 U3.3 U3.13 U4.2 U4.7
I_OUT1: U2A.1 U6.20
I_OUT2: U2B.1 U6.22
I_OUT3: U2C.1 U6.25
I_OUT4: U2D.1 U6.27
ICSP_PGCLCK: ICSP1.5 U6.16
ICSP_PGDATA: ICSP1.4 U6.17
ICSP_VPP: ICSP1.1 R34.2 U6.18
NetBEAD1_2: BEAD1.2 C2.2 C3.2 U3.10
NetC16_1: C16.1 D6.3 R33.2 R34.1
NetC17_1: C17.1 U6.23
NetD1_2: D1.2 R24.1
NetD2_2: D2.2 R25.1
NetD3_2: D3.3 Q2.1 R26.1
NetD4_2: D4.2 T1.4
NetD4_4: D4.4 T1.6
NetD5_1: D5.1 Q3.2 R30.1
NetD7A_1: D7A.1 D8A.2 F1A.2 Rshunt1A.2 U1A.3
NetD7B_1: D7B.1 D8B.2 F1B.2 Rshunt1B.2 U1B.3
NetD7C_1: D7C.1 D8C.2 F1C.2 Rshunt1C.2 U1C.3
NetD7D_1: D7D.1 D8D.2 F1D.2 Rshunt1D.2 U1D.3
NetOPTO1_1: OPTO1.1 R18.2
NetOPTO2_1: OPTO2.1 R22.1
NetR1A_1: R1A.1 R2A.2 U1A.9
NetR1A_2: R1A.2 R3A.1 U1A.1
NetR1B_1: R1B.1 R2B.2 U1B.9
NetR1B_2: R1B.2 R3B.1 U1B.1
NetR1C_1: R1C.1 R2C.2 U1C.9
NetR1C_2: R1C.2 R3C.1 U1C.1
NetR1D_1: R1D.1 R2D.2 U1D.9
NetR1D_2: R1D.2 R3D.1 U1D.1
NetR2A_1: R2A.1 U1A.5 U1A.8
NetR2B_1: R2B.1 U1B.5 U1B.8
NetR2C_1: R2C.1 U1C.5 U1C.8
NetR2D_1: R2D.1 U1D.5 U1D.8
NetR3A_2: R3A.2 R5A.2 U1A.2
NetR3B_2: R3B.2 R5B.2 U1B.2
NetR3C_2: R3C.2 R5C.2 U1C.2
NetR3D_2: R3D.2 R5D.2 U1D.2
NetR4A_1: R4A.1 U1A.7 U2A.2
NetR4A_2: R4A.2 R6A.2 R7A.2 U1A.6
NetR4B_1: R4B.1 U1B.7 U2B.2
NetR4B_2: R4B.2 R6B.2 R7B.2 U1B.6
NetR4C_1: R4C.1 U1C.7 U2C.2
NetR4C_2: R4C.2 R6C.2 R7C.2 U1C.6
NetR4D_1: R4D.1 U1D.7 U2D.2
NetR4D_2: R4D.2 R6D.2 R7D.2 U1D.6
NetR5A_1: R5A.1 R8A.1 U1A.13
NetR5B_1: R5B.1 R8B.1 U1B.13
NetR5C_1: R5C.1 R8C.1 U1C.13
NetR5D_1: R5D.1 R8D.1 U1D.13
NetR8A_2: R8A.2 R9A.2 U1A.14
NetR8B_2: R8B.2 R9B.2 U1B.14
NetR8C_2: R8C.2 R9C.2 U1C.14
NetR8D_2: R8D.2 R9D.2 U1D.14
NetR9A_1: R9A.1 R10A.2 U1A.10
NetR9B_1: R9B.1 R10B.2 U1B.10
NetR9C_1: R9C.1 R10C.2 U1C.10
NetR9D_1: R9D.1 R10D.2 U1D.10
NetR11A_2: R11A.2 R12A.1
NetR11B_2: R11B.2 R12B.1
NetR11C_2: R11C.2 R12C.1
NetR11D_2: R11D.2 R12D.1
NetR12A_2: R12A.2 R13A.1 U2A.10
NetR12B_2: R12B.2 R13B.1 U2B.10
NetR12C_2: R12C.2 R13C.1 U2C.10
NetR12D_2: R12D.2 R13D.1 U2D.10
NetR14A_1: R14A.1 U2A.5 U2A.8 U2A.13
NetR14A_2: R14A.2 R15A.2 R16A.2 R17A.2 U2A.9
NetR14B_1: R14B.1 U2B.5 U2B.8 U2B.13
NetR14B_2: R14B.2 R15B.2 R16B.2 R17B.2 U2B.9
NetR14C_1: R14C.1 U2C.5 U2C.8 U2C.13
NetR14C_2: R14C.2 R15C.2 R16C.2 R17C.2 U2C.9
NetR14D_1: R14D.1 U2D.5 U2D.8 U2D.13
NetR14D_2: R14D.2 R15D.2 R16D.2 R17D.2 U2D.9
NetR19_2: R19.2 U3.6
NetR21_2: R21.2 U3.7
NetR28_2: R28.2 U4.3
NetT1_1: T1.1 U4.1
NetT1_3: T1.3 U4.8
OSC1: C19.1 U6.31 Y1.2
OSC2: C18.1 U6.30 Y1.1
PWR_ENB: Q1.1 U3.14
S\H\U\T\D\O\W\N\: Q1.3 R31.2 U4.4
TTL_RX: OPTO1.3 R20.2 U6.1
TTL_TX: R22.2 U6.44
USB_D+: C4.2 P2.3 R19.1
USB_D-: C5.2 P2.2 R21.1
USB_RX_LED: D2.1 U3.5
USB_TX_LED: D1.1 U3.11
V1.024: R32.1 U2A.3 U2A.12 U2B.3 U2B.12 U2C.3 U2C.12 U2D.3 U2D.12 U5.1
V+: C7.2 C12.1 D4.1 Q2.3 R26.2 R27.1
V-: C10.1 C13.2 D4.3 Q3.3 R29.2 R30.2
V_OUT1: U2A.14 U6.19
V_OUT2: U2B.14 U6.21
V_OUT3: U2C.14 U6.24
V_OUT4: U2D.14 U6.26
VCC: C14.1 C15.1 D6.2 ICSP1.2 OPTO1.4 R33.1 U6.7 U6.28
VCC_USB: BEAD1.1 C1.2 C6.2 C9.2 OPTO2.4 P2.1 R31.1 T1.2 U3.1 U3.8 U3.9 U4.6
VOLTS_INA: J1A.2 R11A.1
VOLTS_INB: J1B.2 R11B.1
VOLTS_INC: J1C.2 R11C.1
VOLTS_IND: J1D.2 R11D.1
pads on no net: D3.2 D5.2 D6.1 FED1.0 FED2.0 FED3.0 FED4.0 FED5.0 FED6.0 ICSP1.6 ICSP1.A ICSP1.B ICSP1.C J1A.0 J1A.3 J1A.4 J1B.0 J1B.3 J1B.4 J1C.0 J1C.3 J1C.4 J1D.0 J1D.3 J1D.4 OPTO1.5 OPTO1.6 OPTO1.7 OPTO1.8 OPTO2.2 OPTO2.5 OPTO2.6 OPTO2.7 OPTO2.8 P2.0 P2.5 U3.4 U3.16 U4.5 U5.3 U6.12 U6.13 U6.14 U6.15 U6.33 U6.34 U6.37 U6.42

## Silkscreen, mask and mechanical layers (free items; w line width, h text height)
Mechanical 1:
  circle w0.064: c41.367,28.314 r0.032
  circle w0.064: c23.783,28.314 r0.032
  circle w0.064: c41.367,28.314 r0.032
  circle w0.064: c20.467,21.692 r0.032
  circle w0.064: c-23.711,28.314 r0.032
  circle w0.064: c-17.079,28.314 r0.032
  circle w0.064: c-41.295,28.314 r0.032
  circle w0.064: c-23.711,28.314 r0.032
  circle w0.064: c-41.295,-28.297 r0.032
  circle w0.064: c-41.295,-28.297 r0.032
  circle w0.064: c-41.295,-28.297 r0.032
  circle w0.064: c-41.295,28.314 r0.032
  circle w0.064: c41.367,-28.297 r0.032
  circle w0.064: c-41.295,-28.297 r0.032
  lines w0.127: -41.295,-28.297 -23.711,-28.297 -23.711,-24.992 cw(c-20.395,-24.992) -17.079,-24.992 -17.079,-28.297 17.151,-28.297 17.151,-24.992 cw(c20.467,-24.992) 23.783,-24.992 23.783,-28.297 41.367,-28.297 41.367,28.314 23.783,28.314 23.783,25.008 cw(c20.467,25.008) 17.151,25.008 17.151,28.314 -17.079,28.314 -17.079,25.008 cw(c-20.395,25.008) -23.711,25.008 -23.711,28.314 -41.295,28.314 -41.295,-28.297
Mechanical 4:
  lines w0.127: -29.564,-13.992 -24.364,-13.992 ; -29.564,13.992 -24.364,13.992 ; -29.564,14.008 -24.364,14.008 ; -28.564,43.242 -23.364,43.242 ; -28.564,43.258 -23.364,43.258 ; -26.964,-16.608 -26.964,-11.408 ; -26.964,11.392 -26.964,16.592 ; -26.964,11.408 -26.964,16.608 ; -24.275,-25.008 -16.525,-25.008 ; -24.275,24.992 -16.525,24.992 ; -20.4,-28.883 -20.4,-21.133 ; -20.4,21.117 -20.4,28.867 ; 16.597,-25.008 24.347,-25.008 ; 16.597,24.992 24.347,24.992 ; 20.472,-28.883 20.472,-21.133 ; 20.472,21.117 20.472,28.867 ; 24.436,-13.992 29.636,-13.992 ; 24.436,13.992 29.636,13.992 ; 24.436,14.008 29.636,14.008 ; 24.786,-14.008 29.286,-14.008 ; 27.036,-16.592 27.036,-11.392 ; 27.036,-16.258 27.036,-11.758 ; 27.036,11.392 27.036,16.592 ; 27.036,11.408 27.036,16.608 ; -26.964,-16.592 -26.964,-11.392 -26.964,-16.592
  lines w0.254: -26.964,0 24.733,0 27.036,0 ; 0,-1.328 0,0 0,1.328
Mechanical 11:
  drawing of 1150 lines, arcs and shapes, not listed
Mechanical 13:
  circle w0.064: c-25.964,43.258 r0.032
  circle w0.064: c27.036,-13.992 r0.032
  circle w0.064: c-25.964,43.258 r0.032
  circle w0.064: c-26.964,14.008 r0.032
  circle w0.064: c-25.964,43.258 r0.032
  circle w0.064: c-25.964,43.258 r0.032
  circle w0.064: c28.422,-14.792 r0.032
  circle w0.064: c25.65,-13.192 r0.032
  circle w0.064: c20.472,-25.008 r0.032
  circle w0.064: c20.472,24.992 r0.032
  circle w0.064: c40.972,30.092 r0.032
  circle w0.064: c40.972,-30.109 r0.032
  circle w0.064: c42.222,-29.109 r0.032
  circle w0.064: c-42.15,-29.109 r0.032
  circle w0.064: c28.433,30.092 r0.032
  circle w0.064: c-1.682,30.092 r0.032
  circle w0.064: c-1.719,28.297 r0.032
  circle w0.064: c-42.15,-3.86 r0.032
  circle w0.064: c-42.15,-29.109 r0.032
  circle w0.064: c-41.295,-19.099 r0.032

## Text inside footprints (layer, text, board x,y; h text height)
D4: Top Overlay "AC" at 101.691,-9.008 h1.02; Top Overlay "+" at 100.991,-12.208 h1.02; Top Overlay "-" at 103.491,-12.208 h1.02